# Altium PCB Inverter.PcbDoc (part 4 of 4)
Units mm, origin at the board's own origin, x right, y up, seen from the top; angles counter-clockwise.
Board outline 150 x 100 mm, 2 copper layers (Top Layer, Bottom Layer), stack 1.74 mm thick; 301 components, 199 nets, 1760 pads, 839 vias.
Unrouted connection lines stored in the file: 1.
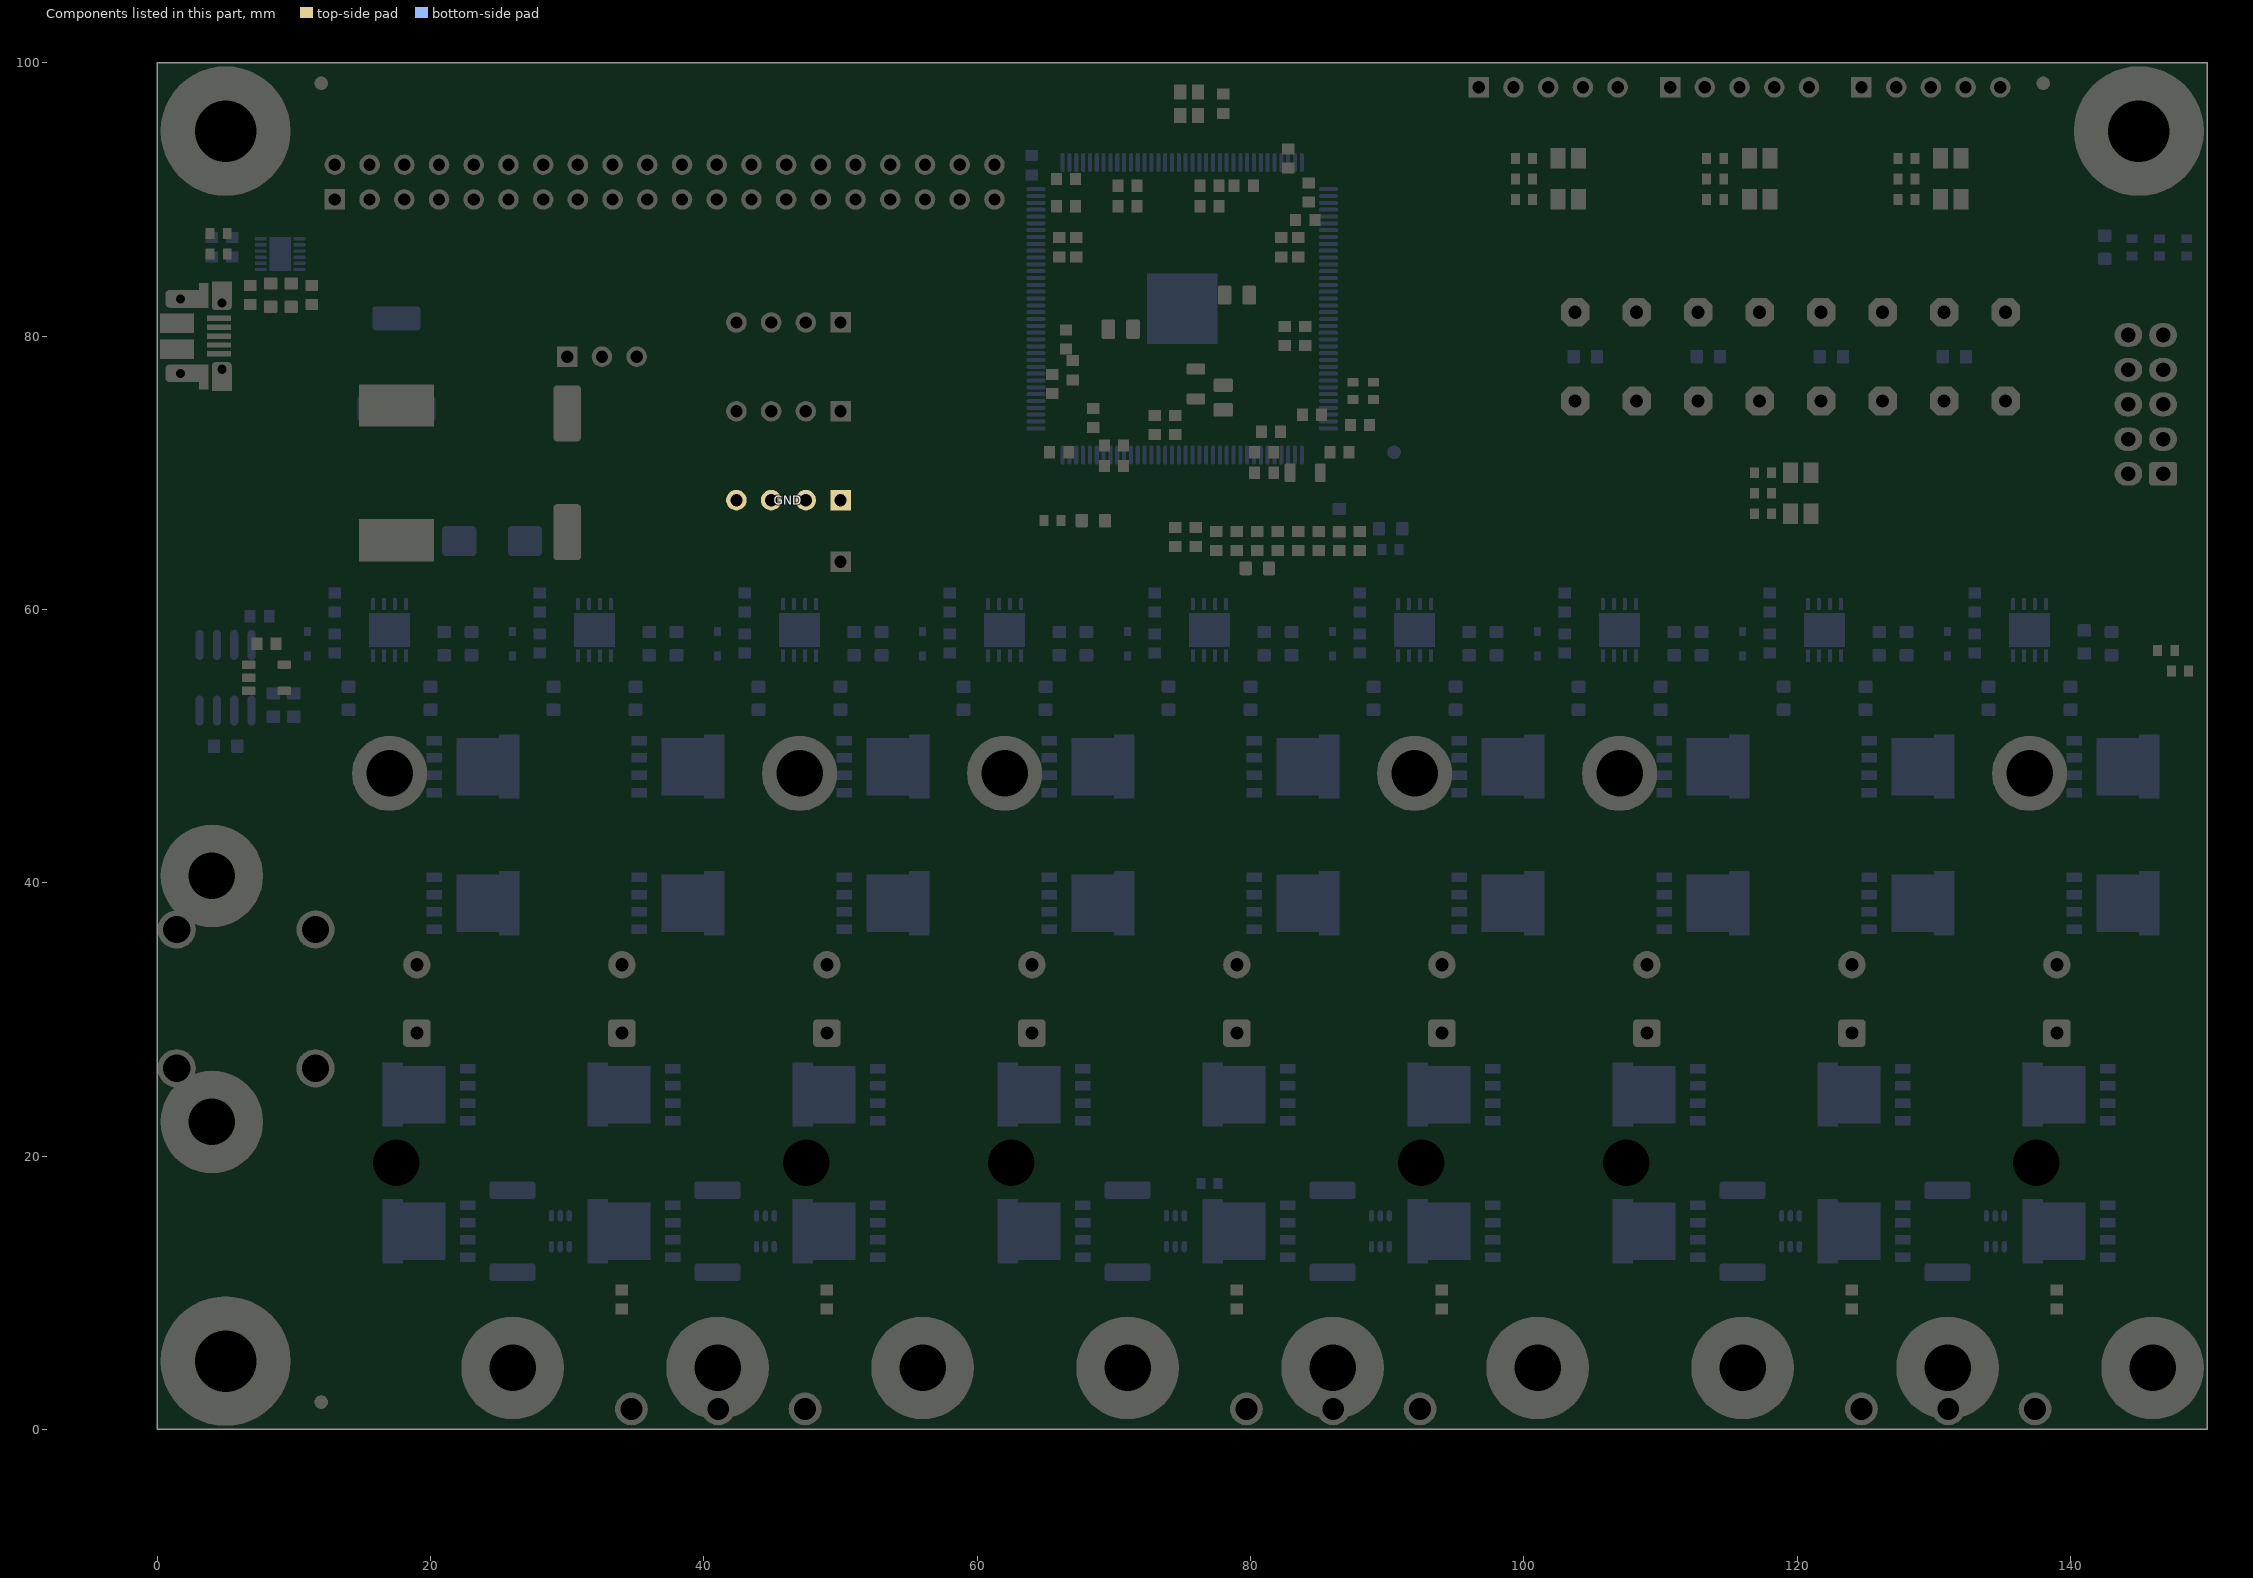
[diagram p4: the components of this part, seen from the top]

## Polygon pours and split planes (outlines as drawn) (continued)
3PH_C on Bottom Layer "M0PHC" (solid, pour order 48): 141,54.5 150,54.5 150,33.5 150,4.5 147.5,2 143.5,2 141,4.5
3PH_C on Bottom Layer "M0PHCO" (solid, pour order 79): 135.5,10.5 135.5,0 150,0 150,10.5
3PH_B on Bottom Layer "M0PHBO" (solid, pour order 76): 125.5,12 125.5,0 135.5,0 135.5,12
3PH_A on Bottom Layer "M0PHAO" (solid, pour order 73): 108.5,12 115,12 116.5,13.5 120,13.5 120,10.5 125.5,10.5 125.5,0 108.5,0
DCBUS on Bottom Layer "M0DCBUSC" (solid, pour order 66): 135,10.5 141.5,10.5 141.5,29.2 135,35.7
DCBUS on Bottom Layer "M0DCBUSA" (solid, pour order 65): 105,10.5 111.5,10.5 111.5,29 105,35.5
DCBUS on Bottom Layer "M0DCBUSB" (solid, pour order 64): 120,10.5 126.5,10.5 126.5,29.2 120,35.7
3PH_A_Q on Bottom Layer "M0PHA" (solid, pour order 47): 111.5,54.5 118.373,54.5 118.373,37.03 120,35.302 120,12.5 111.5,12.5
3PH_B_Q on Bottom Layer "M0PHB" (solid, pour order 46): 126.5,54.5 133.373,54.5 133.373,36.966 135,35.238 135,12.5 126.5,12.5
VCC on Bottom Layer "VCC" (solid, pour order 82): 0,100 0,54.5 150,54.5 150,100
VCC on Bottom Layer "VCCRING" (solid, pour order 85): 67.5,89.5 67.5,74.5 82.5,74.5 82.5,89.5
GND on Bottom Layer "GNDRING" (solid, pour order 86): 64.5,90 64.5,74 67,71.5 83,71.5 85.5,74 85.5,90 83,92.5 67,92.5
DCBUS on Bottom Layer "LDCBUS" (solid, pour order 83): 0,0 21.5,0 21.5,29 21.6,29.1 14,36.7 14,37 14,54.5 0,54.5
GND on Bottom Layer "M0GNDC" (solid, pour order 58): 111.5,29.2 111.5,54.5 104,54.5 104,36.7
GND on Bottom Layer "M0GNDC" (solid, pour order 57): 126.5,29.2 126.5,54.5 119,54.5 119,36.7
GND on Bottom Layer "M0GNDC" (solid, pour order 56): 141,29.7 141,54.5 134,54.5 134,36.7
DCBUS on Top Layer "DCBUS" (solid, pour order 45): 0,31.5 0,11 150,11 150,31.5
GND on Top Layer "BUSGND" (solid, pour order 44): 0,31.5 0,100 150,100 150,31.5

## Silkscreen, mask and mechanical layers (free items; w line width, h text height)
Top Overlay:
  lines w0.2: 20.5,19 20,19.5 ; 20.5,20 20,19.5 ; 23.5,19.5 20,19.5 ; 42,19.5 45,19.5 ; 44.5,19 45,19.5 ; 44.5,20 45,19.5 ; 65.5,19 65,19.5 ; 65.5,20 65,19.5 ; 68.5,19.5 65,19.5 ; 87,19.5 90,19.5 ; 89.5,19 90,19.5 ; 89.5,20 90,19.5 ; 110.5,19 110,19.5 ; 110.5,20 110,19.5 ; 113.5,19.5 110,19.5 ; 132,19.5 135,19.5 ; 134.5,19 135,19.5 ; 134.5,20 135,19.5 ; 20,19.5 20,19.5 ; 20,19.5 20,19.5 ; 45,19.5 45,19.5 ; 45,19.5 45,19.5 ; 65,19.5 65,19.5 ; 65,19.5 65,19.5 ; 90,19.5 90,19.5 ; 90,19.5 90,19.5 ; 110,19.5 110,19.5 ; 110,19.5 110,19.5 ; 135,19.5 135,19.5 ; 135,19.5 135,19.5
  lines w0.4: 12,88 16,88 ; 12,94.5 16,94.5 ; 50.5,88 56.5,88 ; 50.5,94.5 56.5,94.5 ; 58,88 62,88 ; 58,94.5 62,94.5
  text "G" at 13.5,95 h1.27
  text "S" at 53,95 h1.27
  text "G" at 59.5,95 h1.27
  text "V" at 96.5,95 h1.27
  text "A" at 99,95 h1.27
  text "B" at 101.5,95 h1.27
  text "Z" at 104,95 h1.27
  text "G" at 106.5,95 h1.27
  text "V" at 110.5,95 h1.27
  text "A" at 113,95 h1.27
  text "B" at 115.5,95 h1.27
  text "Z" at 118,95 h1.27
  text "G" at 120.5,95 h1.27
  text "V" at 124.5,95 h1.27
  text "A" at 127,95 h1.27
  text "B" at 129.5,95 h1.27
  text "Z" at 132,95 h1.27
  text "G" at 134.5,95 h1.27
  text "20" at 35,94.5 h1.27
  text "G" at 13.5,86 h1.27
  text "S" at 53,86 h1.27
  text "G" at 59.5,86 h1.27
  text "Plastic washer" at 24.5,19 h1.27
  text "Plastic washer" at 69.5,19 h1.27
  text "Plastic washer" at 114.5,19 h1.27
Top Solder:
  rectangle: 0,12 147,17
  rectangle: 0,41 147,46

## Text inside footprints (layer, text, board x,y; h text height)
GPIO: Top Overlay "39" at 63,89 h1.27; Top Overlay "40" at 63,92 h1.27; Top Overlay "2" at 10,92 h1.27; Top Overlay "1" at 10.25,89.5 h1.27
J12: Top Overlay "2" at 141.182,70.174 h0.76 r270; Top Overlay "10" at 141.182,80.595 h0.76 r270; Top Overlay "1" at 149.437,69.829 h0.76 r90; Top Overlay "9" at 149.437,79.547 h0.76 r90